# EAGLE board lun1k (EAGLE 6.3)
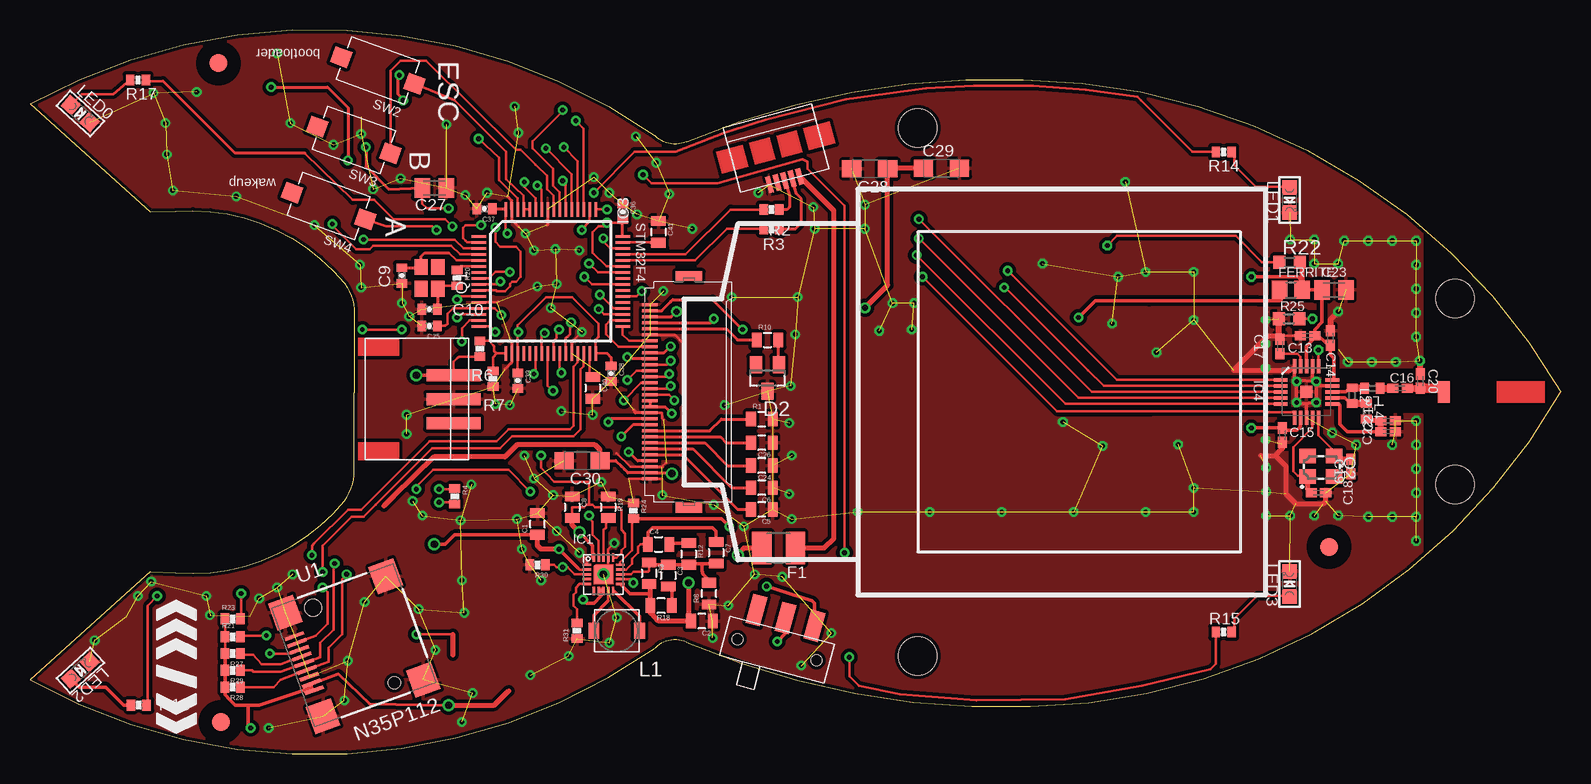
[diagram p0: board, top side]
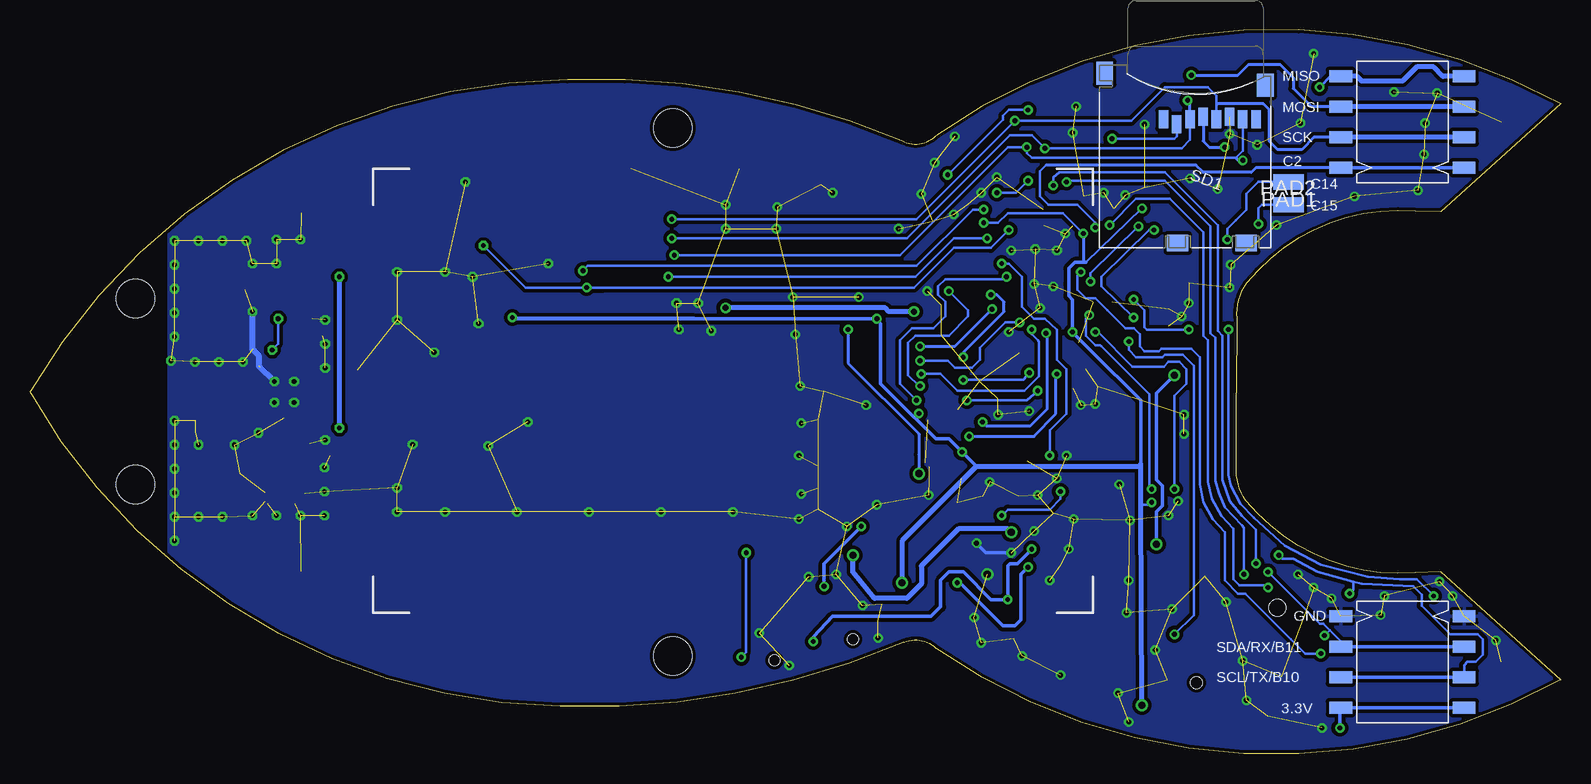
[diagram p1: board, bottom side, seen from below]

Size 127.6 x 60.33 mm. Coordinates in mm from the lower left corner, seen from the top.
Outline: 0,54.16 arc-64 52.1,51.51 arc62 54.52,50.93 54.73,51.02 arc-25 82.8,56.16 arc-59 127.6,30.16 arc-59 83.4,3.96 arc-25 54.73,9.3 54.52,9.39 arc62 52.1,8.81 arc-64 0,6.16 10,15.16 12.14,15.09 arc55 26.23,21.11 arc41 27.02,24 27.02,30.11 27.01,36.31 arc41 26.22,39.2 arc55 12.13,45.22 10,45.16 0,54.16
Copper layers (1*16): Top 0.035mm / dielectric 1.5mm / Bottom 0.035mm
Design rules "default": minimum track width 0.2mm, minimum drill 0.4mm, track to track 0.2mm, track to pad 6mil, pad to pad 6mil, via to via 0.2mm, smd to smd 6mil, copper to edge 0.2mm, drill to drill 8mil, minimum pad ring 8mil, minimum via ring 0.2mm, stop-mask expansion 4mil, vias tented up to drill 2.8mm, thermal gap 10mil
Net classes: 1 FAT: width 0.2 mm, drill 0.4 mm; 2 GND/3V3: width 0.2 mm, drill 0.4 mm
Holes 3.2 mm at 118.8,37.96 74,8.16 74,52.16 118.8,22.46
tRestrict: area 14.5,1.2 to 17.3,4.1; area 14.3,56.1 to 17.1,59; area 106.9,15.8 to 109.7,18.7

## Footprints (pad centres in the part's own frame; a part is rotated, then mirrored left to right if it is on the bottom)
CHIPANTENNA = smd 1 x 1.8: 1 -2.45,0
0805 = smd 0.8 x 1.2: 1 -0.9,0; 2 0.9,0
0402-CAP = smd 0.7 x 0.9: 1 -0.65,0; 2 0.65,0
C0402K = smd 0.925 x 0.74: 1 -0.6,0; 2 0.6,0
C0805K = smd 1.3 x 1.6: 1 -1,0; 2 1,0
SMC_A = smd 1.6 x 1.4: + -1.5,0; - 1.5,0
SOT23 = smd 1 x 1.4: 1 -0.95,-1.1; 2 0.95,-1.1; 3 0,1.1
R1210 = smd 1.6 x 2.7: 1 -1.4,0; 2 1.4,0
R0805 = smd 1.3 x 1.5: 1 -0.95,0; 2 0.95,0
FIDUCIAL-1.5X3 = smd 1.5 x 1.5: 1 0,0
UD-QFN20 = smd 0.7 x 0.2: 1 -1.4,0.8; 2 -1.4,0.4; 3 -1.4,0; 4 -1.4,-0.4; 5 -1.4,-0.8; 11 1.4,-0.8; 12 1.4,-0.4; 13 1.4,0; 14 1.4,0.4; 15 1.4,0.8 | smd 0.2 x 0.7: 6 -0.8,-1.4; 7 -0.4,-1.4; 8 0,-1.4; 9 0.4,-1.4; 10 0.8,-1.4; 16 0.8,1.4; 17 0.4,1.4; 18 0,1.4; 19 -0.4,1.4; 20 -0.8,1.4 | smd 1.5 x 1.5: 21 0,0
LQFP64 = smd 0.24 x 1.2: 1 -3.75,-6; 2 -3.25,-6; 3 -2.75,-6; 4 -2.25,-6; 5 -1.75,-6; 6 -1.25,-6; 7 -0.75,-6; 8 -0.25,-6; 9 0.25,-6; 10 0.75,-6; 11 1.25,-6; 12 1.75,-6; 13 2.25,-6; 14 2.75,-6; 15 3.25,-6; 16 3.75,-6; 33 3.75,6; 34 3.25,6; 35 2.75,6; 36 2.25,6; 37 1.75,6; 38 1.25,6; 39 0.75,6; 40 0.25,6; 41 -0.25,6; 42 -0.75,6; 43 -1.25,6; 44 -1.75,6; 45 -2.25,6; 46 -2.75,6; 47 -3.25,6; 48 -3.75,6 | smd 1.2 x 0.24: 17 6,-3.75; 18 6,-3.25; 19 6,-2.75; 20 6,-2.25; 21 6,-1.75; 22 6,-1.25; 23 6,-0.75; 24 6,-0.25; 25 6,0.25; 26 6,0.75; 27 6,1.25; 28 6,1.75; 29 6,2.25; 30 6,2.75; 31 6,3.25; 32 6,3.75; 49 -6,3.75; 50 -6,3.25; 51 -6,2.75; 52 -6,2.25; 53 -6,1.75; 54 -6,1.25; 55 -6,0.75; 56 -6,0.25; 57 -6,-0.25; 58 -6,-0.75; 59 -6,-1.25; 60 -6,-1.75; 61 -6,-2.25; 62 -6,-2.75; 63 -6,-3.25; 64 -6,-3.75
QFN20 = smd 1 x 1: 0 0,0 | smd 1.158 x 0.3: 1 -2.154,1; 2 -2.154,0.5; 3 -2.154,0; 4 -2.154,-0.5; 5 -2.154,-1; 11 2.154,-1; 12 2.154,-0.5; 13 2.154,0; 14 2.154,0.5; 15 2.154,1 | smd 0.3 x 1.158: 6 -1,-2.154; 7 -0.5,-2.154; 8 0,-2.154; 9 0.5,-2.154; 10 1,-2.154; 16 1,2.154; 17 0.5,2.154; 18 0,2.154; 19 -0.5,2.154; 20 -1,2.154
XF2H-3015-1LW = smd 1.3 x 0.25: 1 3.175,7.25; 2 3.175,6.75; 3 3.175,6.25; 4 3.175,5.75; 5 3.175,5.25; 6 3.175,4.75; 7 3.175,4.25; 8 3.175,3.75; 9 3.175,3.25; 10 3.175,2.75; 11 3.175,2.25; 12 3.175,1.75; 13 3.175,1.25; 14 3.175,0.75; 15 3.175,0.25; 16 3.175,-0.25; 17 3.175,-0.75; 18 3.175,-1.25; 19 3.175,-1.75; 20 3.175,-2.25; 21 3.175,-2.75; 22 3.175,-3.25; 23 3.175,-3.75; 24 3.175,-4.25; 25 3.175,-4.75; 26 3.175,-5.25; 27 3.175,-5.75; 28 3.175,-6.25; 29 3.175,-6.75; 30 3.175,-7.25 | smd 2.2 x 0.8: M1 -0.075,9.65; M2 -0.075,-9.65
SMD4012 = smd 0.9 x 1.3: P$1 -1.9,0; P$2 1.9,0
R0402 = smd 0.7 x 0.9: 1 -0.65,0; 2 0.65,0
CHIPLED_0805 = smd 1.2 x 1.2: A 0,-1.05; C 0,1.05
SMD1,27-2,54 = smd 1.27 x 2.54: 1 0,0
X22 = smd 1.3 x 1.1: 1 0.9,0.7; 2 -0.9,0.7; 3 -0.9,-0.7; 4 0.9,-0.7
CRYSTAL3.2X2.5 = smd 1.4 x 1.2: 1 -1.1,-0.85; 2 1.1,-0.85; 3 1.1,0.85; 4 -1.1,0.85
0402-RES = smd 0.7 x 0.9: 1 -0.65,0; 2 0.65,0
R0603 = smd 1 x 1.1: 1 -0.85,0; 2 0.85,0
MICROSD_MICROSD = smd 0.8 x 1.5: 1 -1.94,2.7; 2 -0.84,2.3; 3 0.26,2.7; 4 1.36,2.9; 5 2.46,2.7; 6 3.56,2.9; 7 4.66,2.7; 8 5.76,2.7 | smd 1.4 x 1.9: NC -6.85,6.55; NC3 6.55,5.55 | smd 1.8 x 1.4: NC1 -0.75,-7.6; NC2 4.95,-7.6
JS102011SAQN = smd 1.2 x 2.5: 1 -2.5,2.75; 2 0,2.75; 3 2.5,2.75 | hole 0.9: 3.4,0; -3.4,0
SWITCH_MCTAEF = smd 1.5 x 1.4: 1 -3.25,0; 2 3.25,0
N35P112 = smd 1.65 x 0.3: 1 -4.4,-2.4; 2 -4.4,-1.8; 3 -4.4,-1.2; 4 -4.4,-0.6; 5 -4.4,0; 6 -4.4,0.6; 7 -4.4,1.2; 8 -4.4,1.8; 9 -4.4,2.4 | smd 2.2 x 2.4: 10 -4.45,4.5; 11 4.45,4.5; 12 4.45,-4.7; 13 -4.45,-4.7 | hole 1.4: -2.1,4.1 | hole 1: 2.1,-4.1
RECEPTABLE_1X4_HORIZ_SMT = smd 1.016 x 1.905: 1 -3.81,-5.144; 1@1 -3.81,5.144; 2 -1.27,-5.144; 2@1 -1.27,5.144; 3 1.27,-5.144; 3@1 1.27,5.144; 4 3.81,-5.144; 4@1 3.81,5.144
MICROAB = smd 0.4 x 1.4: D+ 0,0; D- -0.65,0; GND 1.3,0; KEY 0.65,0; VUSB -1.3,0
JST-PH3 = smd 1 x 4.5: 1 2,0; 2 0,0; 3 -2,0

## Placement (x,y rotation side)
ANT  CHIPANTENNA  [CHIPANTENNA]  120.3,30.16 0 top
C1  10µF  [0805]  42.3,19.16 90 top
C2  22µF  [0805]  56,11.06 180 top
C3  33pF  [0805]  53.2,14.86 270 top
C4  330pF  [0805]  52.4,17.46 0 top
C5  1µF  [0805]  61,20.37 180 top
C6  1µF  [0805]  61,22.18 180 top
C7  10pF  [0805]  57.2,16.76 270 top
C8  1µF  [0805]  45.2,20.56 270 top
C9  22pF  [0402-CAP]  31,39.86 90 top
C10  22pF  [0402-CAP]  33.3,37.06 0 top
C13  100nF  [C0402K]  106.5,34.86 180 top
C14  100nF  [C0402K]  108.4,34.66 90 top
C15  100nF  [C0402K]  104.4,26.56 270 top
C16  1.5pF  [C0402K]  114.2,30.46 180 top
C17  33nF  [C0402K]  104.2,33.96 90 top
C18  22pF  [C0402K]  107.4,21.76 0 top
C19  22pF  [C0402K]  110.1,23.96 270 top
C20  1pF  [C0402K]  115.9,31.06 90 top
C21  2.2nF  [C0402K]  113.2,27.76 0 top
C22  4.7pF  [C0402K]  113.2,26.86 0 top
C23  10uF  [C0805K]  108.7,38.66 180 top
C24  1µF  [0805]  61,24.03 180 top
C25  100nF  [0402-CAP]  33.3,35.66 180 top
C26  1µF  [0805]  61,25.93 180 top
C27  10uF  [C0805K]  33.7,47.16 180 top
C28  10µF  [SMC_A]  69.99,48.76 180 top
C29  10µF  [SMC_A]  75.98,48.8 0 top
C30  10µF  [SMC_A]  46.01,24.44 180 top
C36  100nF  [0402-CAP]  49.41,45.17 270 top
C37  100nF  [0402-CAP]  37.89,45.42 180 top
C38  100nF  [0402-CAP]  48.45,31.69 270 top
C39  100nF  [0402-CAP]  40.66,31.1 270 top
C40  2,2µF  [0805]  46.91,30.5 270 top
C41  2,2µF  [0805]  52.39,43.5 270 top
D2  [SOT23]  61.47,31.33 180 top
F1  MF-MSMD035  [R1210]  62.4,17.16 180 top
FERRITE  [R0805]  105.1,38.66 0 top
FID1  FIDUCIAL1.5X3  [FIDUCIAL-1.5X3]  15.9,2.66 0 top
FID2  FIDUCIAL1.5X3  [FIDUCIAL-1.5X3]  108.3,17.26 0 top
FID3  FIDUCIAL1.5X3  [FIDUCIAL-1.5X3]  15.7,57.56 0 top
IC1  LTC3558  [UD-QFN20]  47.8,14.96 0 top
IC3  STM32F405RGT  [LQFP64]  43.41,39.37 270 top
IC4  NRF24L01SMD  [QFN20]  106.4,30.16 0 top
J2  XF2-3015-1LW  [XF2H-3015-1LW]  54.85,30.16 180 top
L1  2,2µH  [SMD4012]  48.9,10.26 180 top
L2  8.2nH  [R0402]  110.2,29.86 270 top
L3  3.9nH  [R0402]  111.9,30.46 0 top
L4  2.7nH  [R0402]  111.4,28.56 270 top
LED0  APT2012SGC  [CHIPLED_0805]  4.19,53.36 228 top
LED1  APT2012SGC  [CHIPLED_0805]  105,46.16 180 top
LED2  APT2012SGC  [CHIPLED_0805]  4.19,6.96 312 top
LED3  APT2012SGC  [CHIPLED_0805]  105,14.16 0 top
PAD1  [SMD1,27-2,54]  22.7,47.66 90 bottom
PAD2  [SMD1,27-2,54]  22.7,45.76 270 bottom
Q1  Q12M-SMD-S  [X22]  33.3,39.66 270 top
Q2  3.2X2.5CRYSTAL  [CRYSTAL3.2X2.5]  107.6,23.96 0 top
R1  1M  [0805]  61,27.9 0 top
R2  33  [0402-RES]  61.8,45.36 0 top
R3  33  [0402-RES]  61.8,43.76 0 top
R4  680k  [0402-RES]  35.4,21.46 270 top
R6  220k  [0402-RES]  37.5,33.76 270 top
R7  100k  [0402-RES]  38.6,31.26 90 top
R8  150k  [0805]  56.6,13.36 90 top
R9  470k  [0805]  51.6,15.06 270 top
R10  50R  [0805]  61.48,34.5 0 top
R12  15k  [0805]  54.9,16.66 270 top
R14  1k  [0402-RES]  99.5,50.16 0 top
R15  1k  [0402-RES]  99.5,10.16 0 top
R16  1k  [0402-RES]  9.07,4.06 180 top
R17  1k  [0402-RES]  9,56.16 180 top
R18  121k  [0805]  52.6,12.36 180 top
R19  2.2k  [0805]  48.2,20.56 270 top
R20  680k  [0402-RES]  35.6,39.66 270 top
R21  10k  [0402-RES]  16.9,9.76 0 top
R22  R1002-1%63  [R0603]  105,40.96 0 top
R23  10k  [0402-RES]  16.9,11.26 0 top
R24  680k  [0402-RES]  50.3,20.26 270 top
R25  22k  [R0603]  104.95,36.26 0 top
R27  10k  [0402-RES]  16.9,8.36 180 top
R28  10k  [0402-RES]  16.9,5.56 180 top
R29  10k  [0402-RES]  16.9,6.96 180 top
R30  680k  [0402-RES]  42.3,15.76 180 top
R31  680k  [0402-RES]  45.6,10.26 90 top
SD1  MICROSD_SF-MICROSD  [MICROSD_MICROSD]  31.17,50.19 0 bottom
SW1  JS102011SAQN  [JS102011SAQN]  62.27,8.68 345 top
SW2  SWITCH_MCTAEF  [SWITCH_MCTAEF]  29,56.96 160 top
SW3  SWITCH_MCTAEF  [SWITCH_MCTAEF]  27,51.16 160 top
SW4  SWITCH_MCTAEF  [SWITCH_MCTAEF]  24.9,45.66 160 top
U1  N35P112  [N35P112]  27,9.06 20 top
U$1  RECEPTABLE_1X4_HORIZ_SMT  [RECEPTABLE_1X4_HORIZ_SMT]  13.2,7.66 270 bottom
U$2  RECEPTABLE_1X4_HORIZ_SMT  [RECEPTABLE_1X4_HORIZ_SMT]  13.2,52.66 90 bottom
X1  MICROUSB  [MICROAB]  62.91,47.78 195 top
X1_  JST-PH3  [JST-PH3]  35.3,29.56 90 top

## Library data of the parts
ANT Q2 SW1 X1 X1_ = badge
C1-C8 C24 C26 C40 C41 FID1-FID3 IC4 R1 R10 R21 R23 R27-R29 = SparkFun
C9 C10 C25 C36-C39 = SparkFun-Capacitors
C13-C23 C27-C30 F1 FERRITE L2-L4 R22 R25 = rcl
D2 = diode
IC1 L1 Q1 SW2-SW4 U$1 U$2 = seb
IC3 = stm32
J2 = con-omron; OC_FARNELL: 1112560; OC_NEWARK: unknown
LED0 LED1-LED3 = microbuilder
PAD1 PAD2 = wirepad
R2 R3 R6 R7 R14-R17 = SparkFun-Passives
R4 R8 R9 R12 R18-R20 R24 R30 R31 = SparkFun-Resistors
SD1 = sd
U1 = miscellany

## Nets
3.3V [GND/3V3]: C2.2 C27.2 C36.2 C37.1 C38.1 C39.1 FERRITE.1 IC1.11 IC3.19 IC3.32 IC3.43 IC3.48 IC3.64 J2.4 J2.13 J2.14 J2.27 R4.2 R9.2 R18.2 R21.1 R23.1 R27.2 R28.2 R29.2 SD1.4 U1.1 U1.2 U$1.4 U$1.4@1
+3V3_RF: C13.1 C14.1 C15.1 C23.2 FERRITE.2 IC4.7 IC4.15 IC4.18 R22.2
+5V [FAT]: C8.2 F1.2 IC1.16 IC1.20 IC3.42
+12V: C30.+ J2.2 J2.29
CE: IC3.49 IC4.1
CHG: IC1.19 IC3.16
CS_EXT: IC3.10 U$2.1 U$2.1@1
CSN: IC3.50 IC4.2 R22.1
D0: IC3.24 J2.17
D1: IC3.25 J2.18
D2: IC3.26 J2.19
D3: IC3.27 J2.20
D4: IC3.36 J2.21
D5: IC3.35 J2.22
D6: IC3.34 J2.23
D7: IC3.33 J2.24
D+: R2.2 X1.D+
D-: R3.2 X1.D-
D/C: IC3.23 J2.11
E [GND/3V3]: IC3.38 J2.16
EN2: IC1.15 R24.2 SW1.3
GND [GND/3V3]: C1.2 C2.1 C5.1 C6.1 C8.1 C9.1 C10.1 C13.2 C14.2 C15.2 C17.2 C18.2 C19.2 C20.2 C21.2 C22.2 C23.1 C24.1 C25.2 C26.1 C27.1 C28.- C29.- C30.- C36.1 C37.2 C38.2 C39.2 C40.2 C41.1 D2.3 IC1.1 IC1.17 IC1.21 IC3.12 IC3.18 IC3.28 IC3.57 IC3.63 IC4.0 IC4.8 IC4.14 IC4.17 IC4.20 J2.1 J2.3 J2.12 J2.25 J2.30 LED0.C LED1.C LED2.C LED3.C R1.2 R7.1 R8.1 R19.1 R24.1 R25.1 R30.2 R31.1 SD1.6 U1.3 U1.9 U1.10 U1.11 U1.12 U1.13 U$1.1 U$1.1@1 X1.GND X1_.2
INTN: IC3.8 U1.7
IREF: J2.9 R1.1
IRQ: IC3.46 IC4.6
LED0: IC3.9 R17.1
LED1: IC3.54 R14.1
LED2: IC3.11 R16.1
LED3: IC3.55 R15.1
MISO: IC3.52 IC4.5 SD1.7 U$2.4 U$2.4@1
MOSI: IC3.53 IC4.4 SD1.3 U$2.3 U$2.3@1
N$1: C9.2 IC3.5 Q1.3
N$2: IC1.18 R19.2
N$3: C10.2 Q1.1 R20.2
N$4: LED0.A R17.2
N$5: LED2.A R16.2
N$6: LED3.A R15.2
N$7: C3.1 C7.2 IC1.13 R8.2 R9.1 R12.2
N$8: F1.1 X1.VUSB
N$9: LED1.A R14.2
N$10: C18.1 IC4.9 Q2.1
N$11: C19.1 IC4.10 Q2.3
N$12 [GND/3V3]: ANT.1 C16.1 C20.1
N$13: C3.2 R18.1
N$14: D2.1 R10.2
N$15: C25.1 IC3.13 R4.1
N$16: C4.2 R12.1
N$17: C4.1 C7.1 IC1.14
N$18: IC1.10 L1.P$1
N$19: C40.1 IC3.31
N$20: C41.2 IC3.47
N$21: IC3.3 PAD1.1
N$22: IC1.9 L1.P$2
N$23: IC3.4 PAD2.1
N$25: IC1.3 IC1.12 R30.1
N$27: IC1.5 R31.2
N$28: IC3.6 R20.1
N$70: C17.1 IC4.19
N$71: IC4.16 R25.2
N$73: C21.1 C22.1 IC4.11 L4.2
N$78: IC4.12 L2.2 L4.1
N$79: IC4.13 L2.1 L3.1
N$80: C16.2 L3.2
R/W [GND/3V3]: IC3.40 J2.15
REG_EN_: IC3.15
RES: IC3.22 J2.10
RESETN: R27.1 U1.6
SCK: IC3.51 IC4.3 SD1.5 U$2.2 U$2.2@1
SCL: IC3.58 R29.1 U1.5
SCL2: IC3.29 R23.2 U$1.3 U$1.3@1
SDA: IC3.59 R28.1 U1.4
SDA2: IC3.30 R21.2 U$1.2 U$1.2@1
SS3: IC3.62 SD1.2
SW2: IC3.60 IC3.61 SW2.1
SW3: IC3.56 SW3.1
SW4: IC3.14 SW4.1
SWITCHN: IC3.2 U1.8
USB_DM: IC3.44 R3.1
USB_DP: IC3.45 R2.1
VBAT [FAT]: IC3.1
VBREF: C5.2 J2.5
VCOMH: C28.+ C29.+ J2.28
VLIPO: C1.1 IC1.2 IC1.7 IC1.8 R6.2 SW1.2 X1_.1
VOLTAGE: IC3.17 R6.1 R7.2
VPA: C6.2 J2.6
VPB: C24.2 J2.7
VPC: C26.2 J2.8
VSL: J2.26 R10.1

## Tracks (layer width: path | path; a pad name or v marks a point on that pad's centre or on a via)
3.3V  (via drill 0.4, 0.6)
  Top 0.203: IC1.11 49.3,14.06
  Top 0.229: C39.1 IC3.19 40.66,35.16 | 39.61,45.42 IC3.64 39.66,43.53 v39.8,43.36 | 48.09,33.37 IC3.32 47.16,34.53 47.3,34.66 47.4,34.76 47.4,35.86 45.2,38.06 43,38.06 40.66,35.73 40.66,35.16 | C27.2 32.7,45.86 33.1,45.46 v34.9,45.46 | v40.7,35.16 40.66,35.16 | IC3.48 49.41,44.26 v48.1,44.26 47.8,43.96 47.5,43.96 47.4,43.96 46.9,43.46 46.9,41.76 48.04,40.62 IC3.43 | R4.2 35.25,20.96 v34.1,20.96 | R27.2 R21.1 R23.1
  Top 0.254: C39.1 | IC3.48 C36.2 | C37.1 39.61,45.42 | 48.09,33.37 48.45,33.02 C38.1 | v28,50.56 28,48.96 29.9,47.06 C27.2 | U1.1 23.48,5.51 U1.2 25.7,6.66 28.3,4.16 v34.9,4.06 | J2.4 50.65,24.41 v49.9,25.16 | J2.14 J2.13 52.95,28.91 v53.5,28.36 | J2.27 56.75,35.91 v57,36.26
  Top 0.3: 102.4,37.76 104.2,37.76 104.3,37.86 104.3,38.66 FERRITE.1
  Top 0.305: 102.4,37.76 93.3,37.76 88.8,37.76 v87.4,36.36 | R27.2 R29.2 R28.2 16.25,4.91 16.7,4.46 17.1,4.06 18.2,4.06 | 23.48,5.51 19.1,4.06 18.2,4.06 | v18.4,2.16 18.2,2.36 18.2,4.06 | R18.2 51.9,12.16 | R9.2 51.7,14.06 | 49.3,14.06 49.4,13.96 49.6,13.76 50,13.36 51.7,13.36
  Top 0.406: 51.7,14.06 51.7,13.36 R18.2 51.7,11.76 52,11.46 52.4,11.06 C2.2 54.9,10.76 v54.9,14.26 | v34.9,4.06 38.7,4.06 39.7,5.06 39.9,5.26
  Bottom 0.203: v34.1,20.96 34.3,20.76 35,20.76
  Bottom 0.229: 39.2,33.66 39.15,33.61 | v34.9,45.46 39.6,40.96 | v48.1,44.26 47.6,44.26 46.9,44.26 46.1,45.06 41.5,45.06 v39.8,43.36
  Bottom 0.254: SD1.4 29.81,51.07 29.3,50.56 v28,50.56 | v49.9,25.16 49.75,25.01 | v53.5,28.36 53.9,28.06 53.85,28.01 | v39.8,43.36 39.8,41.06 39.9,40.96
  Bottom 0.305: v87.4,36.36 v57,36.26 | v57,36.26 56.7,35.86 56.7,30.86 53.9,28.06 53.85,28.01 52.1,26.26 51,26.26 v49.9,25.16 49.75,25.01 48.7,23.96 | 35.2,23.96 35,24.16 35,29.46 39.15,33.61 40.15,34.61 v40.7,35.16 40.7,37.86 41,38.16 41,39.16 41,40.46 40.5,40.96 39.9,40.96 39.6,40.96 | U$1.4@1 U$1.4 18.4,3.8 v18.4,2.16 | 87.2,36.26 v57,36.26
  Bottom 0.406: v34.9,4.06 35,20.76 35,24.16 | 35.2,23.96 48.7,23.96 54.9,17.76 v54.9,14.26
+3V3_RF  (via drill 0.4)
  Top 0.2: 107.1,34.66 C13.1 107.4,34.86 | 108.7,31.31 IC4.15 | 108,34.26 108.1,34.26 108.3,34.06 C14.1 | C15.1 104.6,26.96
  Top 0.3: 107.1,34.66 106.4,33.96 IC4.18 | C14.1 108.4,33.26 108.7,32.96 108.7,31.31 | 107.4,34.86 108,34.26 | 104.6,26.96 105.6,26.96 105.9,27.26 IC4.7 | C13.1 107.1,35.36 107.7,35.96 C23.2 FERRITE.2 106.1,38.71 106.1,39.36 105.7,39.76 v101.8,39.76 | v101.8,27.16 C15.1
  Top 0.4: R22.2 106.05,40.76 FERRITE.2
  Bottom 0.4: v101.8,27.16 v101.8,39.76
+5V  (via drill 0.4, 0.6)
  Top 0.203: IC1.16 48.9,16.36 49.3,16.76 49.3,16.96 49.6,17.26 49.6,18.36 49.3,18.66 49.3,20.36 49.1,20.56 47.1,20.56 46.9,20.76 46.7,20.76 | IC1.20 46.9,16.36 | C8.2 45.2,20.56 46.2,20.56 46.4,20.76 46.7,20.76 | 43.7,22.66 46.6,22.66 46.6,20.76 46.7,20.76
  Top 0.229: IC3.42 47.34,40.12 v46.6,40.86 | v42.6,24.86 42.6,23.86 43.7,22.66
  Top 0.305: 46.9,16.36 46.9,17.36 v45.8,18.46
  Top 0.406: v45.8,18.46 45.2,19.06 C8.2 | v59,16.56 59.5,17.16 F1.2
  Bottom 0.229: v46.6,40.86 46,40.86 44.9,39.76 44.9,37.86 44.9,37.26 43.9,36.26 43,36.26 42,35.36 42,32.86 41.2,32.06 41.2,28.36 42.6,26.96 v42.6,24.86
  Bottom 0.406: v45.8,18.46 46.1,18.76 50.2,18.76 53.3,15.66 53.3,14.16 54.5,12.96 57.2,12.96 59,15.16 v59,16.56
+12V  (via drill 0.4, 0.6)
  Top 0.254: C30.+ 48.82,24.44 49.3,23.96 49.55,23.71 49.85,23.41 J2.2 53.45,23.41 v53.5,23.36 | J2.29 52.65,36.91 53.4,37.66 53.6,37.86 56.9,37.86 v59.4,35.36
  Top 0.406: C30.+ 47.51,25.35 47.1,25.76 40.6,25.76 39.6,24.76 33.7,24.76 30.3,21.46 29.5,20.66
  Bottom 0.254: v59.4,35.36 59.4,32.56 53.5,26.66 53.5,24.96 v53.5,23.36
CE  (via drill 0.4)
  Top 0.2: 91.4,31.16 IC4.1
  Top 0.229: IC3.49 v48.09,45.37 v48.1,45.36 | v81.5,40.26 90.6,31.16 91.4,31.16
  Bottom 0.229: v48.1,45.36 49,45.36 53.7,40.66 81.1,40.66 v81.5,40.26
CHG  (via drill 0.4)
  Top 0.203: IC1.19 47.4,17.76 46.9,18.26 46.9,19.36 46.7,19.56
  Top 0.229: 46.7,19.56 46.6,19.66 v46.6,19.86 | v41.7,21.86 39.9,23.66 33.6,23.66 32.2,22.26 v32.2,22.06 | v38.8,35.16 38.36,35.62 IC3.16
  Bottom 0.229: v46.6,19.86 46.1,20.36 42.6,20.36 41.7,21.26 v41.7,21.86 | v32.2,22.06 32.2,22.56 32.2,29.86 31.2,30.86 31.2,32.06 31.8,32.66 32.7,32.66 33.1,32.26 35.7,32.26 38.6,35.16 v38.8,35.16
CS_EXT  (via drill 0.4)
  Top 0.203: IC3.10 38.84,38.62 38.9,38.56 39.6,38.56 40,38.96 40,39.16 40.2,39.36 40.5,39.36 40.9,39.76 40.9,41.66 40.9,41.86 40.5,42.26 39.2,42.26 38.8,42.66 v38.8,43.86
  Bottom 0.203: v38.8,43.86 38.8,44.26 40.3,45.76 42.7,45.76 43.4,46.46 43.4,48.56 42.9,49.06
  Bottom 0.254: U$2.1@1 25.41,48.85 25.8,48.46 29.8,48.46 30.4,49.06 42.9,49.06
  Bottom 0.305: U$2.1@1 U$2.1
CSN  (via drill 0.4)
  Top 0.2: R22.1 102.7,40.96 100.5,43.16 90.6,43.16 v89.8,42.36
  Top 0.229: IC3.50 46.66,44.43 v46,43.66 | IC4.2 89.5,30.66 88.2,31.96 81.3,38.86 v81.2,38.86
  Bottom 0.229: v46,43.66 47.5,42.16 50.6,42.16 53.9,38.86 79.8,38.86 | 79.8,38.86 v81.2,38.86 | v81.2,38.86 86.3,38.86 v89.8,42.36 | v81.2,38.86 79.8,38.86
D0  (via drill 0.4)
  Top 0.203: J2.17 50.95,30.91 v49.5,29.46
  Top 0.229: v43.6,30.26 43.16,30.7 IC3.24
  Bottom 0.203: v49.5,29.46 44.5,29.46 v43.6,30.26
D1  (via drill 0.4)
  Top 0.203: J2.18 53.05,31.41 v53.3,31.66
  Top 0.229: IC3.25 43.66,34.43 43.9,34.66 43.9,35.16 v44.1,35.36
  Bottom 0.203: v53.3,31.66 51.7,31.66 50.3,30.26 44.7,30.26 43.5,31.46 43.5,34.36 43.6,34.46 44.1,34.96 v44.1,35.36
D2  (via drill 0.4)
  Top 0.203: J2.19 50.55,31.91 v49.8,31.16
  Top 0.229: IC3.26 44.16,32 v44.3,31.76
  Bottom 0.203: v49.8,31.16 44.8,31.16 v44.3,31.76
D3  (via drill 0.4)
  Top 0.203: J2.20 53.05,32.41 v53.4,32.76
  Top 0.229: IC3.27 44.66,34.63 44.9,34.86 45,34.96 45,35.86 v45.1,35.96
  Bottom 0.203: v53.4,32.76 51.1,32.76 50.5,32.16 49.1,32.16 48.4,32.86 48.4,33.86 46.3,35.96 v45.1,35.96
D4  (via drill 0.4)
  Top 0.203: IC3.36 48.64,37.12 v47.5,38.26
  Top 0.254: J2.21 49.95,32.91 v49.8,33.06
  Bottom 0.254: v49.8,33.06 49.8,33.46 46.4,36.86 46.4,37.66 47,38.26 v47.5,38.26
D5  (via drill 0.4)
  Top 0.203: IC3.35 47.84,36.62 v47.4,37.06
  Top 0.254: J2.22 52.85,33.41 v53.4,33.96
  Bottom 0.254: v53.4,33.96 50.5,33.96 v47.4,37.06
D6
  Top 0.203: J2.23 49.05,33.91 48,34.96 48,35.76 48.36,36.12 IC3.34
D7
  Top 0.203: J2.24 49.95,34.41 49.41,34.95 IC3.33
D+
  Top 0.254: X1.D+ 63.3,46.56 63.3,45.56 63.1,45.36 R2.2
D-
  Top 0.254: R3.2 63.8,43.76 64.3,44.26 64.3,46.26 63.9,46.66 X1.D-
D/C  (via drill 0.4)
  Top 0.229: IC3.23 42.66,34.83 v42.9,35.06
  Top 0.254: J2.11 48.45,27.91 v48.2,27.66
  Bottom 0.254: v48.2,27.66 47.9,27.36 44.2,27.36 42.8,28.76 42.8,34.96 v42.9,35.06
E  (via drill 0.4)
  Top 0.203: J2.16 53.15,30.41 v53.4,30.66 | v51,38.56 50.56,38.12 IC3.38
  Bottom 0.203: v53.4,30.66 53.5,30.66 54.4,31.56 54.4,34.26 53.8,34.86 51,34.86 49.4,36.46 49.4,36.96 v51,38.56
EN2  (via drill 0.4)
  Top 0.203: IC1.15 49.2,15.96 50.2,16.96 50.2,19.51 R24.2
  Top 0.305: SW1.3 65.4,12.57 65.2,12.76 v61.4,13.96 | v58.3,18.96 57.65,19.61 R24.2
  Bottom 0.305: v61.4,13.96 61.4,15.86 v58.3,18.96
GND  (via drill 0.4, 0.6)  (219 unrouted)
  Top 0.2: 105.35,32.32 105.39,32.32 IC4.20 | 105.39,31.13 v105.58,31.04 | v105.58,29.29 105.51,29.19 105.51,29.27 IC4.0 | 105.52,31.14 105.49,31.16 | 106.32,29.19 106.4,29.11 | C15.2 104.3,25.86 | C17.2 104.22,34.59 104.22,34.84 105.6,34.84 105.62,34.86 C13.2
  Top 0.203: IC1.1 46.4,16.16 v45.8,16.76 | v48.7,17.56 48.2,17.06 IC1.17 48.2,15.36 IC1.21 | IC3.12 38.96,37.62 39,37.66
  Top 0.229: 51.35,28.41 52.65,28.41 52.7,28.36 52.7,27.96 52.8,27.86 | IC3.18 40.16,33.53 | 51.75,23.91 J2.3 | J2.3 50.05,23.91 48.9,25.06 | J2.3 51.75,23.91 | 51.75,23.91 52.65,23.91 53,24.26 | 51.58,22.91 51.05,22.91 | 51.05,22.91 49.95,22.91 | 52.67,22.91 J2.1 | J2.1 51.58,22.91 | 51.58,22.91 51.05,22.91 | 45.16,34.33 v46,35.16 | 51.58,22.91 J2.1
  Top 0.254: J2.3 51.75,23.91 52.75,23.91 | J2.12 51.35,28.41 50.45,28.41 50.45,28.51 50.3,28.66 | J2.25 53.75,34.91 54.4,34.26 | 45.16,34.33 IC3.28 | IC3.57 43.16,44.13 43.1,44.06 | 40.7,43.96 40.16,44.5 IC3.63 40.16,46.1 39.8,46.46 | IC3.18 40.16,32.63 39.6,32.06 | 40.16,34.27 40.16,33.53
  Top 0.3: 105.39,32.32 105.39,31.13 | IC4.17 106.9,31.36 v107.22,31.04 | v105.58,31.04 v105.58,29.29 | 105.51,29.19 106.32,29.19 v107.22,29.29 v107.22,31.04 | v107.22,31.04 105.52,31.14 | IC4.14 107.5,30.66 v107.22,31.04 | 106.4,29.11 IC4.8 | 105.05,31.96 IC4.20
  Top 0.4: 105.05,31.96 100.33,31.96 103.2,34.84 104.22,34.84 | 102.6,24.86 103.8,24.86 | 103.8,24.86 104.4,25.46 C15.2 | C18.2 108,21.06 107.8,20.86 105.5,20.86 104.7,21.66 104.7,23.96 103.8,24.86
  Top 0.5: C14.2 108.4,36.21 v109.05,36.86 | C17.2 104.1,34.66 R25.1 | C20.2 115.9,32.61 v115.85,32.76
  Bottom 0.2: 108.4,32.16 108.4,32.22
  Bottom 0.305: v45.8,16.76 47.9,16.76 v48.7,17.56
  Bottom 0.5: v109.05,36.86 109.05,33.71 108.5,33.16 108.5,32.32 v107.22,31.04
  other vias: 95.7,25.79 93.9,33.46 115.55,25.76 89.4,25.66 91.3,47.66 86.1,27.66 57.9,29.06 103,26.16 115.55,27.76 109.05,19.86 107.05,19.86 105.05,19.86 103.05,19.86 103.05,21.86 103.05,23.86 109.05,40.86 107.05,40.86 107.05,42.86 105.05,42.86 103,32.16 103,34.16 103,36.16 97,40.16 97,36.16 97,22.16 97,20.16 81,20.16 84.4,40.86 69,20.16 70.8,35.26 73.5,35.36 75,20.16 87,20.16 90.2,35.86 93,40.16 93,20.16 90.7,39.76 115.55,23.76 115.55,21.76 115.55,19.76 115.55,17.76 115.55,34.76 115.55,36.76 115.55,38.76 115.55,40.76 115.55,42.76 113.55,19.76 111.55,19.76 113.55,42.76 113.85,32.66 111.85,32.66 113.55,25.76 110.55,25.76 108.55,26.76 109.85,32.66 111.55,42.76 109.55,42.76 47.8,14.96 42,41.96 43.8,42.06 48.9,11.36 48.3,9.26 36.2,11.76 42.6,14.46 41.7,6.56 36,2.66 31.9,21.06 32.7,19.86 41,17.06 40.6,19.56 35.9,19.46 43.9,18.56 43.6,21.56 42,22.96 52.7,21.56 63.5,19.56 57,20.76 58.2,12.36 47.6,22.66 59.5,18.96 33.8,8.66 32.4,12.06 44.9,8.16 56.9,9.66 41.2,24.86 38.8,29.16 31.4,28.26 36.8,22.46 31.6,36.46 31,37.56 27.6,38.86 30.9,47.96 36.3,46.56 38.1,46.76 52.8,38.56 63.8,34.96 63.4,30.66 63.3,27.56 63.5,24.86 63.3,21.66 60.4,14.96 66.8,10.06 62.7,14.76 40,29.06 43.4,37.16 43.9,39.16 42.3,38.96 45.8,41.96 41.3,43.36 64.3,7.36 52.2,49.26 53.3,46.66 60.7,46.76 50.5,51.46 47,48.06 48.3,46.76 50.6,44.96 28.6,47.06 25.3,50.76 27.5,40.76 26.5,7.76 26.2,4.46 19.9,2.16 21.9,14.96 36,14.46 19.1,12.96 9,13.16 5.4,9.46 36.9,5.06 46.9,28.26 44.3,28.56 14.7,13.16 10.1,14.36 27.9,12.66 20.6,13.86 15,11.56 31.4,26.66 71.9,37.56 73.7,37.56 64,38.06 58.5,38.06 65.3,45.56 23.7,44.06 17.2,46.46 11.9,46.96 11.4,49.96 11.3,52.56 10.3,55.06 13.9,55.16 20.6,58.36 21.7,52.56 40.4,53.96 40.7,51.76 34.7,52.46 55.2,43.76 65.4,43.76 69.6,43.76 69.6,45.76 27.6,51.66
  pour Bottom (isolate 0.3): 116,60.16 116,0.16 0.5,0.16 0.5,60.16
  pour Top (isolate 0.3): 116,60.16 116,32.26 107.8,32.26 107.8,29.36 109.7,29.36 109.7,27.66 113.6,27.66 113.6,28.26 116,28.26 116,0.16 0.5,0.16 0.5,60.16
INTN  (via drill 0.4)
  Top 0.203: U1.7 21.5,8.36 20.6,8.36 20.4,8.36 v20,8.36 | v40,40.16 38.8,40.16 38.26,39.62 IC3.8
  Bottom 0.203: v20,8.36 21.3,8.36 22.5,9.56 26.3,13.36 26.9,13.36 28,14.46 28,18.46 29,19.56 29.8,20.96 30.1,22.46 30.1,22.76 30.1,33.06 30.8,33.76 33.3,33.76 33.5,33.56 34.7,33.56 35.1,33.96 35.1,34.96 35.6,35.46 36.3,35.46 37.8,36.96 38.8,37.96 39.6,37.96 40.3,38.66 40.3,39.86 v40,40.16
IREF
  Top 0.254: J2.9 56.65,26.91 57.64,27.9 R1.1
IRQ  (via drill 0.4)
  Top 0.2: 93.5,28.56 103.1,28.56 103.2,28.46 105.3,28.46 105.4,28.36 IC4.6
  Top 0.229: IC3.46 48.34,42.12 47.8,42.66 v47.8,42.96 | v74.4,39.76 85.6,28.56 93.5,28.56
  Bottom 0.229: v47.8,42.96 50.6,42.96 53.8,39.76 v74.4,39.76
LED0  (via drill 0.4)
  Top 0.203: IC3.9 39.04,39.12 v39.2,39.36 | v35.2,43.96 34.6,44.56 30.3,44.56 | 26.9,46.16 22.9,50.06 | 11.1,56.06 9.75,56.06 R17.1
  Top 0.229: 30.3,44.56 28.7,46.16 26.9,46.16
  Top 0.254: 22.9,50.06 17.1,50.06 11.1,56.06
  Bottom 0.203: v39.2,39.36 39.2,40.06 v35.2,43.96
LED1  (via drill 0.4)
  Top 0.2: R14.1 98.7,50.16
  Top 0.203: 98.7,50.16 96.9,50.16 92.6,54.46 92.3,54.76 88,55.36 83.6,55.66 78.7,55.66 74.7,55.46 68,54.56 61.3,52.86 57.9,51.76 53.8,50.16 50.4,50.16 v47,46.76 | v44.4,47.76 44.66,47.5 IC3.54
  Bottom 0.203: v47,46.76 45.4,46.76 v44.4,47.76
LED2  (via drill 0.4)
  Top 0.203: IC3.11 35.84,38.12 v35.6,37.86 | v31,35.36 v27.7,35.36 | v10.6,13.16 9.8,12.36 9.8,4.14 R16.1
  Bottom 0.203: v35.6,37.86 34.7,36.96 34.7,35.56 34.5,35.36 v31,35.36 | v10.6,13.16 12,14.56 13.4,14.56 16.1,14.76 20,15.76 23,17.36 25.6,19.66 26.7,20.86 27.5,22.36 27.7,23.26 v27.7,35.36
LED3  (via drill 0.4)
  Top 0.203: R15.1 98.85,7.51 98.4,7.06 92.7,5.66 86.3,4.56 78.9,4.46 72.5,4.96 69.1,5.66 68.3,6.46 v68.3,8.06 | v67.9,16.76 67.9,45.66 64.8,48.76 64.8,49.36 64.4,49.56 57.3,47.56 51.8,47.56 v51.1,48.26 | IC3.55 44.16,46.8 43.6,47.36 43.6,48.76 41.9,50.46 41.9,51.06 44.4,53.56 v44.4,53.66
  Bottom 0.203: v68.3,8.06 67.9,8.46 v67.9,16.76 | v51.1,48.26 46.5,52.86 46.5,53.16 46,53.66 v44.4,53.66
MISO  (via drill 0.4)
  Top 0.2: 92.4,29.16 IC4.5
  Top 0.203: 92.4,29.16 86.3,29.16 v73.9,41.56
  Top 0.229: IC3.52 45.66,49.4 v44.5,50.56
  Top 0.254: v20.1,55.56 24.8,55.56 26.5,53.86 v26.5,49.46
  Bottom 0.203: v73.9,41.56 55.1,41.56 46.1,50.56 v44.5,50.56
  Bottom 0.229: v44.5,50.56 44.5,50.06 44.1,49.66 27.1,49.66 26.5,50.26 SD1.7
  Bottom 0.254: U$2.4@1 19.19,56.47 v20.1,55.56 | v26.5,49.46 26.9,49.46 27.1,49.66
  Bottom 0.406: U$2.4 9.81,56.47 10.6,57.26 12,57.26 13.2,56.06 16.6,56.06 17.01,56.47 U$2.4@1
MOSI  (via drill 0.4)
  Top 0.2: 92.3,29.66 IC4.4
  Top 0.203: 92.3,29.66 87.4,29.66 v74.1,42.96
  Top 0.229: IC3.53 45.16,48.3 v43,50.46
  Top 0.254: v31.1,54.46 31.1,54.56 30.7,54.96 30.7,56.46 v30.8,56.56
  Bottom 0.203: v74.1,42.96 54.5,42.96 45.9,51.56 44.1,51.56 v43,50.46
  Bottom 0.229: v43,50.46 31.6,50.46 30.9,51.16 SD1.3
  Bottom 0.254: SD1.3 30.91,54.27 v31.1,54.46 | v30.8,56.56 26.9,56.56 26,57.46 23.4,57.46 22.3,56.36 22.3,55.46 20.8,53.96 18.37,53.96 U$2.3@1
  Bottom 0.406: U$2.3 U$2.3@1
N$1
  Top 0.229: 34.9,41.76 35.54,41.12 IC3.5
  Top 0.254: C9.2 32.6,40.51 Q1.3 32.6,41.46 32.9,41.76 34.9,41.76
N$2
  Top 0.203: IC1.18 47.8,18.66 48,18.86 48,19.36 R19.2
N$3
  Top 0.229: R20.2 34.25,39.01 Q1.1
  Top 0.254: C10.2 34,37.11 Q1.1
N$4
  Top 0.2: R17.2 6.95,54.96 4.31,54.96 LED0.A
N$5
  Top 0.2: R16.2 8.2,4.06
  Top 0.3: 8.2,4.06 7.8,4.06 6.3,5.56 4.11,5.56 LED2.A
N$6
  Top 0.2: LED3.A 105,13.16 102.3,13.16 100.4,11.26 100.4,10.16 R15.2
N$7
  Top 0.203: IC1.13 50.1,14.96 50.3,15.16 51.5,15.16 51.6,15.26 R9.1
  Top 0.305: R9.1 51.8,15.76 C3.1 R12.2 55,15.86 56,15.86 | 56,15.86 56.1,15.86 C7.2 | R8.2 56.4,14.66 56.1,14.96 56,15.26 56,15.86
N$8
  Top 0.406: F1.1 66.2,17.16 67,17.96 67,45.28 X1.VUSB
N$9
  Top 0.2: LED1.A 105,47.26 102.2,47.26 100.4,49.06 100.4,50.16 R14.2
N$10
  Top 0.2: 106.45,23.06 Q2.1 106.45,23.16 105.7,23.16 105.3,23.56 105.3,25.56 106.9,27.16 IC4.9
  Top 0.4: C18.1 106.5,22.06 Q2.1
N$11
  Top 0.2: Q2.3 108.6,24.91 108.6,25.36 107.4,26.56 IC4.10
  Top 0.4: C19.1 108.95,24.56 Q2.3
N$12
  Top 0.6: C16.1 C20.1
  Top 0.8: C20.1 117.75,30.46 ANT.1
N$13
  Top 0.305: C3.2 53.5,13.66 R18.1
N$14
  Top 0.254: D2.1 62.38,32.46 R10.2
N$15  (via drill 0.4)
  Top 0.203: v39.3,36.56 38.74,37.12 IC3.13 35.26,37.12 34.8,36.66 34.8,35.86 34.6,35.66 C25.1
  Top 0.229: R4.1 35.35,22.06 v34.1,22.06
  Bottom 0.203: v39.3,36.56 39.6,36.26 39.6,34.86 38.8,34.06 38.4,34.06 38.3,33.96 34.3,29.96 34.3,22.36 34.2,22.26 v34.1,22.06
N$16
  Top 0.305: C4.2 53.4,17.56 R12.1
N$17
  Top 0.203: IC1.14 49.7,15.36 50.2,15.86 50.2,16.26 50.7,16.76 50.7,17.26 50.9,17.46 C4.1
  Top 0.305: C7.1 57.2,18.56 56.9,18.86 51.9,18.86 51.5,18.46 C4.1
N$18
  Top 0.203: IC1.10 48.7,13.56
  Top 0.305: 48.7,13.56 50.8,11.46 L1.P$1
N$19
  Top 0.229: IC3.31 46.66,31.42
  Top 0.254: 46.66,31.42 C40.1
N$20
  Top 0.229: IC3.47 51.67,42.62
  Top 0.254: 51.67,42.62 C41.2
N$21  (via drill 0.4)
  Top 0.229: IC3.3 36.14,42.12 35.4,42.86 v27.8,42.86
  Bottom 0.229: v27.8,42.86 27.8,43.76 27.1,44.46 26.2,45.36 26.2,46.66 25.2,47.66 PAD1.1
N$22
  Top 0.203: IC1.9 48.2,12.76
  Top 0.305: 48.2,12.76 47,11.56 L1.P$2
N$23  (via drill 0.4)
  Top 0.229: IC3.4 35.84,41.62 35.1,42.36 28.6,42.36 28.3,42.06 27.2,42.06 25.2,44.06 v25.2,44.16
  Bottom 0.229: v25.2,44.16 25.2,45.46 24.9,45.76 PAD2.1
N$25  (via drill 0.4)
  Top 0.203: IC1.3 45.4,14.96 44.8,15.56 v44.4,15.56 43.9,15.56 43.7,15.76 R30.1 | IC1.12 50,14.56 v50.3,14.26
  Bottom 0.305: v50.3,14.26 50.1,14.26 46.5,10.66 45.5,10.66 45,11.16 45,14.96 v44.4,15.56
N$27
  Top 0.203: IC1.5 45.8,14.16 45.5,13.86 45.5,13.46 45.3,13.26 45.3,12.36 45.6,12.06 R31.2
N$28
  Top 0.229: IC3.6 35.91,40.62 R20.1
N$70
  Top 0.2: IC4.19 105.9,33.11 105.65,33.36 104.45,33.36 104.2,33.11 C17.1
N$71  (via drill 0.4)
  Top 0.2: v106.9,36.26 R25.2 | IC4.16 v107.4,33.66
  Bottom 0.2: v106.9,36.26 106.9,34.16 v107.4,33.66
N$73
  Top 0.3: 111.45,27.76 L4.2 | IC4.11 109.1,29.16 109.2,29.06 109.2,27.46 109.8,26.86 C22.1
  Top 0.4: C21.1 111.45,27.76
  Top 0.5: C22.1 C21.1
N$78
  Top 0.3: IC4.12 109.6,29.66 110.05,29.21 L2.2
  Top 0.6: L2.2 L4.1
N$79
  Top 0.3: 110.15,30.36 L2.1 110.05,30.51 109.7,30.16 IC4.13
  Top 0.6: L2.1 111,30.51 L3.1
N$80
  Top 0.6: L3.2 C16.2
R/W  (via drill 0.4)
  Top 0.203: J2.15 53.25,29.91 v53.7,29.46 | v46.2,39.76 46.84,39.12 IC3.40
  Bottom 0.203: v53.7,29.46 55.1,30.86 55.1,34.46 54.1,35.46 52.3,35.46 51.3,36.46 51.3,37.66 51.9,38.26 51.9,38.96 51.3,39.56 46.4,39.56 v46.2,39.76
REG_EN_  (via drill 0.4)
  Top 0.229: IC3.15 36.66,36.12 36,35.46 v36,34.36 | v32.2,9.96 35.25,9.96
  Top 0.406: 35.25,8.26 35.25,9.96
  Bottom 0.229: v36,34.36 36,33.66 35.4,33.06 33.2,33.06 33,33.26 31.5,33.26 30.6,32.36 30.6,11.56 v32.2,9.96
RES  (via drill 0.4)
  Top 0.229: IC3.22 42.16,31.7 v42,31.66
  Top 0.254: J2.10 50.25,27.41 v49.3,26.46
  Bottom 0.254: v49.3,26.46 43.9,26.46 42.1,28.36 42.1,31.56 v42,31.66
RESETN
  Top 0.229: U1.6 20.9,7.46 19.3,7.46 18.6,8.26 17.6,8.26 17.55,8.21 R27.1
SCK  (via drill 0.4)
  Top 0.2: 92.2,30.16 IC4.3
  Top 0.203: 92.2,30.16 88.5,30.16 v74.1,44.56
  Top 0.229: IC3.51 46.16,52.1 v45.5,52.76
  Bottom 0.2: SD1.5
  Bottom 0.203: v74.1,44.56 53.7,44.56 v45.5,52.76
  Bottom 0.229: v45.5,52.76 35.8,52.76 33,55.56 29.4,55.56 28.7,54.86 28.7,54.06 SD1.5
  Bottom 0.254: U$2.2@1 20.57,51.39 21.6,50.36 22.3,50.36 23.6,50.36 24.3,51.06 24.3,53.66 24.8,54.16 28.6,54.16 28.7,54.06
  Bottom 0.406: U$2.2 U$2.2@1
SCL  (via drill 0.4)
  Top 0.203: 24.2,8.06 24.2,9.26 25.3,10.36 25.3,15.76 v25.4,15.86 | v42.3,47.36 42.66,47 IC3.58
  Top 0.229: 24.2,8.06 U1.5 20.9,6.86 18.6,6.86 18.5,6.96 R29.1
  Bottom 0.203: v25.4,15.86 25.4,18.66 26.6,19.86 27.6,21.06 28.2,22.86 28.2,34.86 28.6,35.26 28.6,44.06 33,48.46 41.8,48.46 42.3,48.06 v42.3,47.36
SCL2  (via drill 0.4)
  Top 0.229: IC3.29 45.66,32.63 45.3,32.26 45.3,27.36 45,27.06 39.9,27.06 38.9,26.06 33.3,26.06 27.6,20.36 26.5,20.36 23.7,17.56 23.5,17.36 v23.5,16.56 | R23.2 17.6,11.31 v17.6,13.36
  Bottom 0.229: v23.5,16.56 23.2,16.26 22.3,16.26 20.3,15.16 17.28,14.35 | 17.28,14.35 16.6,14.16 12.3,13.96 11.6,13.26 11.6,12.36 9.2,9.96 6.9,9.96 6.5,9.56 6.5,8.26 7.1,7.66 7.8,7.66 8.06,7.41 U$1.3@1 | v17.6,13.36 17.28,13.69 17.28,14.35
  Bottom 0.305: U$1.3@1 U$1.3
SDA  (via drill 0.4)
  Top 0.203: U1.4 24.9,7.66 24.9,8.86 26,9.96 26,14.56 v26.4,14.96 | v41.2,47.66 41.2,47.26 42.16,46.3 IC3.59
  Top 0.229: U1.4 20.9,6.16 20.3,5.56 R28.1
  Bottom 0.203: v26.4,14.96 26.4,18.86 26.6,19.06 28,20.56 28.5,21.76 28.8,22.76 28.8,34.66 29.2,35.06 29.2,43.96 33,47.76 40.9,47.76 v41.2,47.66
SDA2  (via drill 0.4)
  Top 0.229: IC3.30 46.16,32.33 45.9,32.06 45.9,27.06 45.3,26.46 40.2,26.46 39.2,25.46 33.5,25.46 28.8,20.76 27.8,19.76 26.9,19.76 26.8,19.76 24.4,17.36 v24.4,15.16 | R21.2 17.65,9.86 v19.7,9.86
  Bottom 0.229: v24.4,15.16 20.1,10.86 19.8,10.86 19.25,10.31 | 19.25,10.31 18.34,9.41 U$1.2 | v19.7,9.86 19.25,10.31
  Bottom 0.305: U$1.2@1 U$1.2
SS3  (via drill 0.4)
  Top 0.203: IC3.62 40.66,46.3 39.1,47.8 39.1,49.66 v37.4,51.26
  Bottom 0.203: v37.4,51.26 32.2,51.26 32,51.46 SD1.2
SW2
  Top 0.229: SW2.1 35.4,54.46 39.7,50.16 39.7,47.9 41.16,46.5 IC3.61 IC3.60
SW3
  Top 0.203: IC3.56 43.66,46.5 43.1,47.06 43.1,48.16 42.16,49.1 40.9,50.36 40.5,50.36
  Top 0.229: SW3.1 30.05,56.92 30.9,57.76 33,57.76 40.5,50.36
SW4  (via drill 0.4)
  Top 0.203: v35.6,36.36 35.84,36.62 IC3.14 | 29.7,43.96 31.4,43.96 33.5,43.96 v33.9,43.66
  Top 0.229: 29.7,43.96 SW4.1
  Bottom 0.203: v33.9,43.66 34.3,43.66 38.3,39.76 38.3,38.96 v35.6,36.36
SWITCHN  (via drill 0.4)
  Top 0.203: U1.8 23.8,9.86 24.8,10.86 24.8,13.46 24.6,13.66 v24.4,13.86 | v37.6,44.06 36.3,44.06 36.1,43.86 36.1,42.96 36.3,42.76 36.44,42.62 IC3.2
  Bottom 0.203: v24.4,13.86 24.7,14.06 26.4,14.06 26.6,14.06 26.8,14.06 27.3,14.56 27.3,18.76 28.3,19.86 29.1,21.26 29.4,22.66 29.4,34.46 29.8,34.86 29.8,43.46 32.6,46.26 35.4,46.26 v37.6,44.06
USB_DM
  Top 0.229: IC3.44 55.46,41.12 58.1,43.76 R3.1
USB_DP
  Top 0.229: IC3.45 54.66,41.62 58.4,45.36 R2.1
VBREF
  Top 0.254: J2.5 54.45,24.91 58.99,20.37 C5.2
VCOMH  (via drill 0.5)
  Top 0.254: J2.28 53.45,36.41 v53.9,36.86
  Top 0.406: C29.+ 71.53,48.8 C28.+ 71.49,39.06 v69.6,37.16
  Bottom 0.406: v53.9,36.86 56,36.86 56.3,37.16 v69.6,37.16
VLIPO  (via drill 0.4, 0.6)
  Top 0.203: IC1.2 45.8,15.36 45.7,15.46 | IC1.8 47.6,13.56 IC1.7 47.6,13.76
  Top 0.229: X1_.1 35.3,32.66 35.6,32.96 35.75,33.11 R6.2
  Top 0.254: 47.6,13.16 47.6,13.56 47.6,13.76
  Top 0.305: 47.6,13.16 47,12.56 46.4,12.56 v46.1,12.86 | 45.7,15.46 v44.1,17.06 | SW1.2 62.98,10.04 v62.3,9.36 | C1.1 35.4,18.26 34.6,17.46 v33.7,17.46 | v32.2,31.56 X1_.1
  Top 0.406: v44.1,17.06 42.6,17.06 42.3,17.36 C1.1
  Bottom 0.305: v44.1,17.06 45.3,15.86 45.9,15.86 46.1,15.66 v46.1,12.86 47.5,12.86 49.8,15.16 51,15.16 51.7,14.46 51.7,12.26 52.5,11.46 60.7,11.46 62.3,9.76 v62.3,9.36 | v33.7,17.46 33.7,20.16 33.2,20.66 33.2,22.36 33.7,22.86 33.7,30.06 v32.2,31.56
VOLTAGE
  Top 0.203: IC3.17 38.89,33.37 | 38.89,33.37 38.7,33.56 38.7,33.96 38.6,34.06 38.25,34.41 R6.1 | R7.2 38.6,33.08 38.89,33.37
VPA
  Top 0.254: J2.6 55.25,25.41 58.48,22.18 C6.2
VPB
  Top 0.254: J2.7 56.25,25.91 58.14,24.03 C24.2
VPC
  Top 0.254: J2.8 57.55,26.41 58.03,25.93 C26.2
VSL
  Top 0.254: J2.26 58.05,35.41 58.97,34.5 R10.1

## Text on the board
tPlace: bootloader | ESC | B | wakeup | A | STM32F4
bPlace: MISO | MOSI | SCK | C2 | C14 | C15 | GND | SDA/RX/B11 | SCL/TX/B10 | 3.3V